# Altium PCB LPCB234R0.PcbDoc (part 1 of 2)
Units mm, origin at the board's own origin, x right, y up, seen from the top; angles counter-clockwise.
Board outline 194 x 165.7 mm, 2 copper layers (Top Layer, Bottom Layer); 143 components, 115 nets, 627 pads, 212 vias.
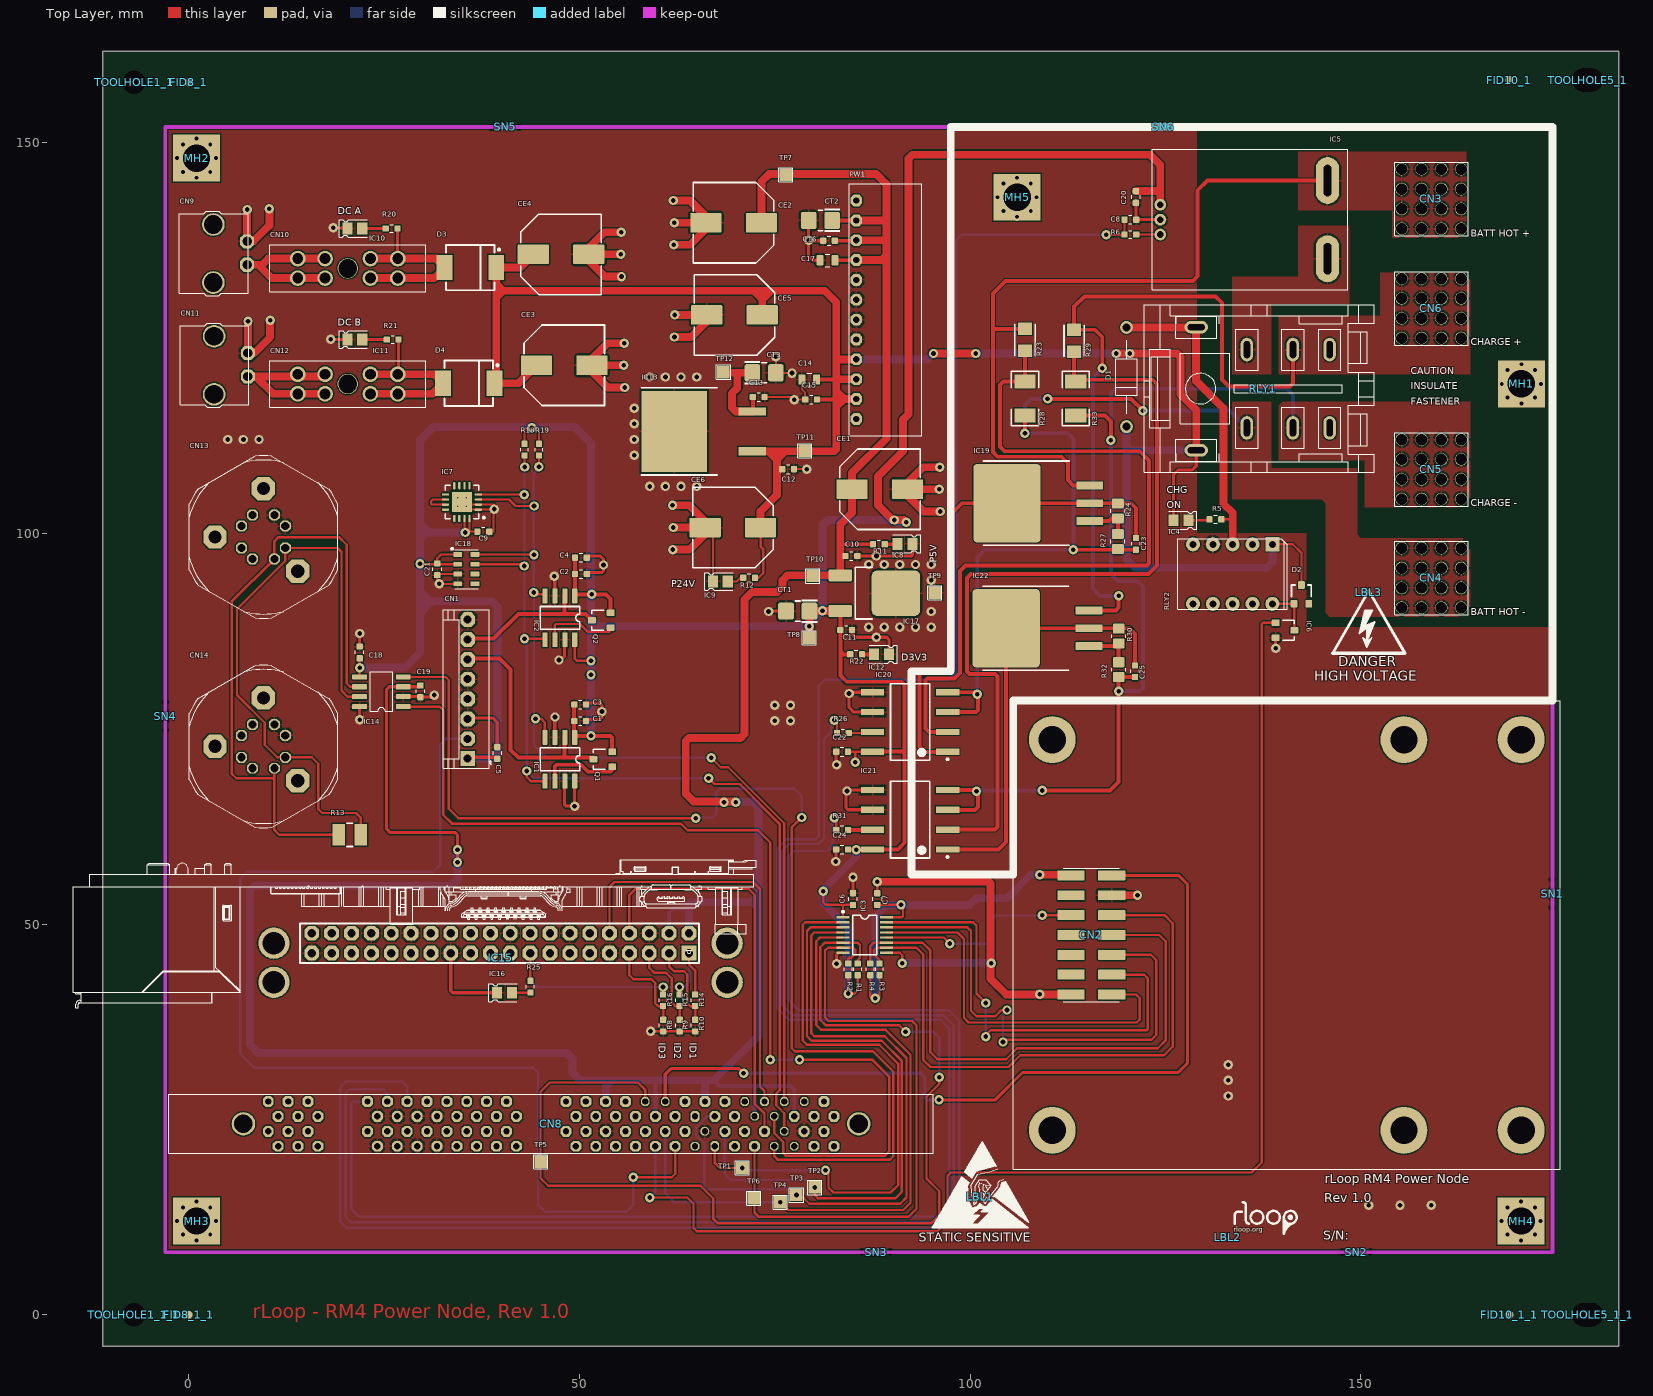
[diagram p0: Top Layer view]
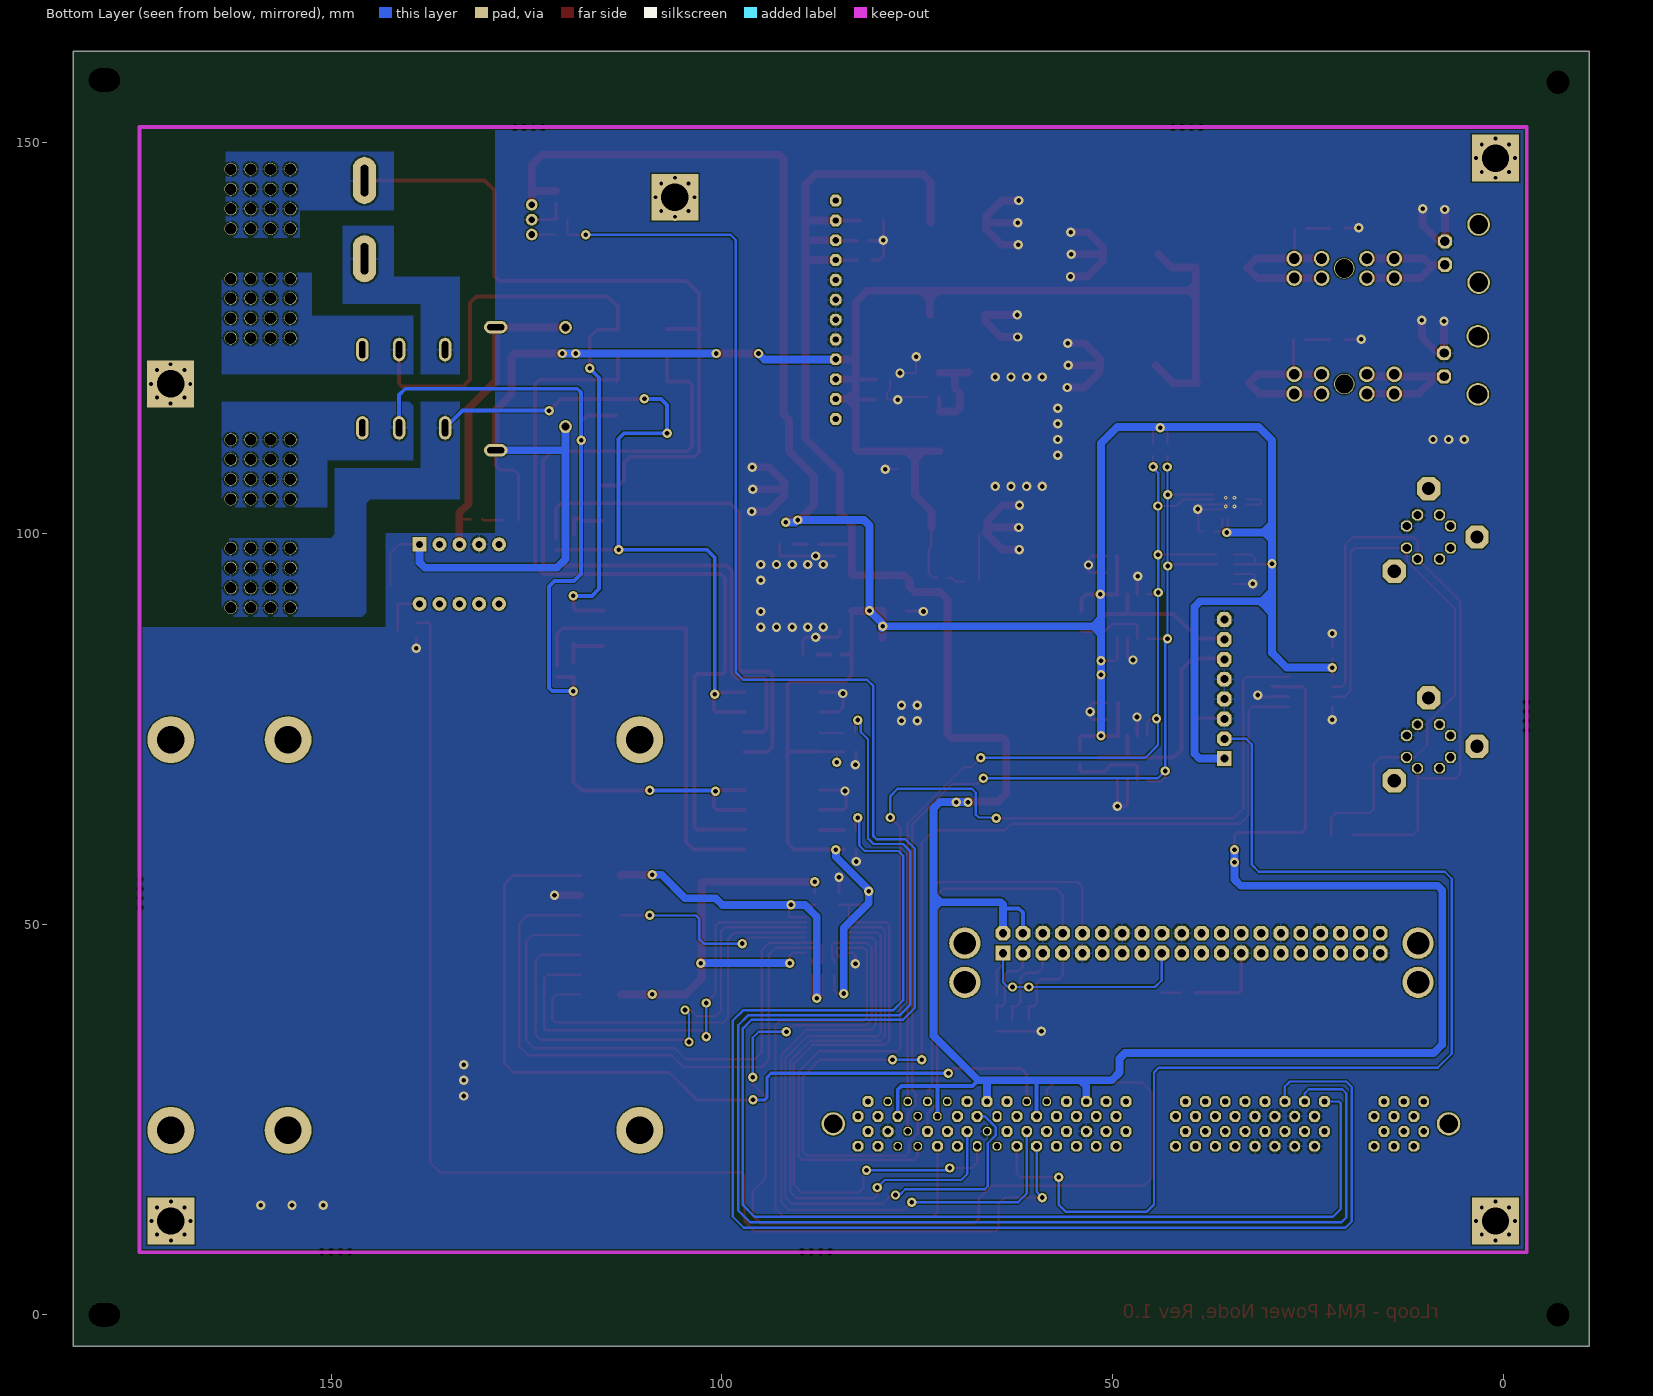
[diagram p1: Bottom Layer view, seen from below]

## Layer stack, top to bottom
Top Layer: signal copper 0.0356
Dielectric: core 0.32, FR-4, Dk 4.8
Bottom Layer: signal copper 0.0356

## Board outline
-11,-4 -11,161.695 183,161.695 183,-4

## Design rules (kind name [scope] priority, off if disabled: settings)
Clearance [All] p1: gap=0.16
HoleSize [All] p1: absolutevalues=TRUE maxlimit=5 minlimit=0.025 maxpercent=80.000 minpercent=20.000
MinimumSolderMaskSliver [All] p1 off: minsoldermaskwidth=0.1
PlaneClearance [All] p1: clearance=0.6
PolygonConnect [IsVia] p1: connectstyle=Direct reliefconductorwidth=0.254 reliefentries=4 polygonreliefangle="90 Angle" airgapwidth=0.254
PolygonConnect PolygonConnect_1 [All] p2: connectstyle=Relief reliefconductorwidth=0.254 reliefentries=4 polygonreliefangle="90 Angle" airgapwidth=0.254
RoomDefinition "U_LPCB234 - PI" [InComponentClass('U_LPCB234 - PI')] p1: confinementstyle=ConfineIn formatcopy=TRUE lockcomponents=FALSE outline -79.611,-126.179 -28.811,-126.179 -28.811,-100.779 -79.611,-100.779
RoomDefinition "U_LPCB234 - CAN" [InComponentClass('U_LPCB234 - CAN')] p2: confinementstyle=ConfineIn formatcopy=TRUE lockcomponents=FALSE outline 28.96,60.133 28.96,110.128 -0.24,110.128 -0.24,60.133
RoomDefinition "U_LPCB234 - PSU" [InComponentClass('U_LPCB234 - PSU')] p3: confinementstyle=ConfineIn formatcopy=TRUE lockcomponents=FALSE outline 54.93,146.887 54.93,81.698 96.88,81.698 96.88,146.887
RoomDefinition "U_LPCB234 - POWER INPUT" [InComponentClass('U_LPCB234 - POWER INPUT')] p4: confinementstyle=ConfineIn formatcopy=TRUE lockcomponents=FALSE outline -3.15,112.5 57.75,112.5 57.75,143.2 -3.15,143.2
RoomDefinition "U_LPCB234 - 24V POWER" [InComponentClass('U_LPCB234 - 24V POWER')] p5: confinementstyle=ConfineIn formatcopy=TRUE lockcomponents=FALSE outline -79.611,-126.179 -28.811,-126.179 -28.811,-100.779 -79.611,-100.779
RoomDefinition "U_LPCB234 - 1 WIRE DRIVER" [InComponentClass('U_LPCB234 - 1 WIRE DRIVER')] p6: confinementstyle=ConfineIn formatcopy=TRUE lockcomponents=FALSE outline 29.481,111.796 29.481,59.276 54.63,59.276 54.63,111.796
RoomDefinition "LPCB234 - OVERVIEW" [InComponentClass('LPCB234 - OVERVIEW')] p7: confinementstyle=ConfineIn formatcopy=TRUE lockcomponents=FALSE outline -79.611,-126.179 -28.811,-126.179 -28.811,-100.779 -79.611,-100.779
RoomDefinition "U_LPCB234 - CHARGER IF" [InComponentClass('U_LPCB234 - CHARGER IF')] p8: confinementstyle=ConfineIn formatcopy=TRUE lockcomponents=FALSE outline -79.611,-126.179 -28.811,-126.179 -28.811,-100.779 -79.611,-100.779
RoomDefinition "U_LPCB234 - CORE INTERFACE" [InComponentClass('U_LPCB234 - CORE INTERFACE')] p9: confinementstyle=ConfineIn formatcopy=TRUE lockcomponents=FALSE outline -79.611,-126.179 -28.811,-126.179 -28.811,-100.779 -79.611,-100.779
RoomDefinition "U_LPCB234 - BMS INTERFACE" [InComponentClass('U_LPCB234 - BMS INTERFACE')] p10: confinementstyle=ConfineIn formatcopy=TRUE lockcomponents=FALSE outline -79.611,-126.179 -28.811,-126.179 -28.811,-100.779 -79.611,-100.779
RoutingVias [All] p1: holewidth=0.6 width=1.2 viastyle="Through Hole" minholewidth=0.6 minwidth=1.2 maxholewidth=1 maxwidth=3
SilkToSilkClearance [All] p1 off: silktosilkclearance=0.254
SilkToSolderMaskClearance [IsPad] p1 off: minsilkscreentomaskgap=0.254 clearancetoexposedcopper=TRUE
SolderMaskExpansion [All] p1: expansion=0.102
Width [All] p1: maxlimit=2 minlimit=0.254 preferedwidth=0.254
23 further rules are at their usual default settings.

## Classes and differential pairs
component class "U_LPCB234 - PSU": C10 C11 C12 C13 C14 C15 C16 C17 CE1 CE2 CE5 CE6 CT1 CT2 CT3 IC8 IC9 IC12 IC13 IC17 PW1 R11 R12 R22 TP7 TP8 TP9 TP10 TP11 TP12
component class "U_LPCB234 - POWER INPUT": CE3 CE4 CN9 CN10 CN11 CN12 D3 D4 IC10 IC11 R20 R21
component class "U_LPCB234 - CORE INTERFACE": CN8
component class "U_LPCB234 - CHARGER IF": C8 C20 C22 C23 C24 C25 CN3 CN4 CN5 CN6 D1 D2 IC4 IC5 IC6 IC19 IC20 IC21 IC22 R5 R6 R23 R24 R26 R27 R28 R29 R30 R31 R32 R33 RLY1 RLY2
component class "U_LPCB234 - BMS INTERFACE": C6 C7 CN2 IC3 R1 R2 R3 R4 TP1 TP2 TP3 TP4 TP5 TP6
component class "U_LPCB234 - 24V POWER": CN1
component class "U_LPCB234 - 1 WIRE DRIVER": C1 C2 C3 C4 C5 C9 C21 IC1 IC2 IC7 IC18 Q1 Q2 R18 R19
component class "LPCB234 - OVERVIEW": LBL1 LBL2 LBL3 MH1 MH2 MH3 MH4 MH5 SN1 SN2 SN3 SN4 SN5 SN6
component class "U_LPCB234 - CAN": C18 C19 CN13 CN14 IC14 R13
component class "U_LPCB234 - PI": IC15 IC16 R8 R9 R10 R14 R15 R16 R25

## Components (designator, comment, footprint, x,y, rotation, side; value= is the part's Value field where it differs from the comment)
C1 "100n / 50V / 10% / SMD 0603" LFP011__CC1608-0603-IPC7351_B 50.09,75.985 r0 top
C2 "100n / 50V / 10% / SMD 0603" LFP011__CC1608-0603-IPC7351_B 50.19,94.785 r0 top
C3 "1uF / 10V / 10% / SMD 0603" LFP011__CC1608-0603-IPC7351_B 50.09,78.085 r0 top
C4 "1uF / 10V / 10% / SMD 0603" LFP011__CC1608-0603-IPC7351_B 50.19,96.885 r0 top
C5 "1uF / 10V / 10% / SMD 0603" LFP011__CC1608-0603-IPC7351_B 39.49,71.885 r90 top
C6 "100n / 50V / 10% / SMD 0603" LFP011__CC1608-0603-IPC7351_B 85,53.2 r90 top
C7 "100n / 50V / 10% / SMD 0603" LFP011__CC1608-0603-IPC7351_B 88.1,53.2 r90 top
C8 "10pF / 50V / 5% / SMD 0603" LFP011__CC1608-0603-IPC7351_B 120.497,140.133 r0 top
C9 "100n / 50V / 10% / SMD 0603" LFP011__CC1608-0603-IPC7351_B 37.7,100.2 r0 top
C10 "100n / 50V / 10% / SMD 0603" LFP011__CC1608-0603-IPC7351_B 84.8,97.1 r0 top
C11 "100n / 50V / 10% / SMD 0603" LFP011__CC1608-0603-IPC7351_B 84.13,87.638 r0 top
C12 "100n / 50V / 10% / SMD 0603" LFP011__CC1608-0603-IPC7351_B 76.7,108.2 r0 top
C13 "100n / 50V / 10% / SMD 0603" LFP011__CC1608-0603-IPC7351_B 72.93,117.438 r0 top
C14 "1uF / 50V / 10% / SMD 0805" LFP010__CC2012-0805-IPC7351_B 79.4,119.68 r180 top
C15 "100n / 50V / 10% / SMD 0603" LFP011__CC1608-0603-IPC7351_B 79.64,117.12 r180 top
C16 "100n / 50V / 10% / SMD 0603" LFP011__CC1608-0603-IPC7351_B 81.93,137.438 r180 top
C17 "1uF / 50V / 10% / SMD 0805" LFP010__CC2012-0805-IPC7351_B 81.73,134.938 r180 top
C18 "100n / 50V / 10% / SMD 0603" LFP011__CC1608-0603-IPC7351_B 21.87,84.76 r90 top
C19 "100n / 50V / 10% / SMD 0603" LFP011__CC1608-0603-IPC7351_B 29.64,79.78 r270 top
C20 "100nF / 50V / 10% / SMD 0603" LFP011__CC1608-0603-IPC7351_B 121.197,143.033 r270 top
C21 "100n / 50V / 10% / SMD 0603" LFP011__CC1608-0603-IPC7351_B 31.8,95.4 r270 top
C22 "100nF / 50V / 10% / SMD 0603" LFP011__CC1608-0603-IPC7351_B 83.6,72.048 r180 top
C23 "100nF / 50V / 10% / SMD 0603" LFP011__CC1608-0603-IPC7351_B 121.2,98.648 r270 top
C24 "100nF / 50V / 10% / SMD 0603" LFP011__CC1608-0603-IPC7351_B 83.6,59.548 r180 top
C25 "100nF / 50V / 10% / SMD 0603" LFP011__CC1608-0603-IPC7351_B 121.1,82.348 r270 top
CE1 "330uF / 35V / 20% / SMD 10x10" LFP041__NICHICON_WT_10X10 88.43,105.638 r0 top
CE2 "330uF / 35V / 20% / SMD 10x10" LFP041__NICHICON_WT_10X10 69.73,139.738 r180 top
CE3 "330uF / 35V / 20% / SMD 10x10" LFP041__NICHICON_WT_10X10 48.05,121.5 r0 top
CE4 "330uF / 35V / 20% / SMD 10x10" LFP041__NICHICON_WT_10X10 47.65,135.7 r0 top
CE5 "330uF / 35V / 20% / SMD 10x10" LFP041__NICHICON_WT_10X10 69.83,127.938 r180 top
CE6 "330uF / 35V / 20% / SMD 10x10" LFP041__NICHICON_WT_10X10 69.63,100.738 r180 top
CN1 "640456-8" 640456-8 35.7,80.058 r90 top
CN2 "1241050-7" 1241050-7 115.5,48.6 r90 top locked
CN3 "7461383" 7461383 159.02,142.78 r180 top locked
CN4 "7461383" 7461383 159.02,94.285 r0 top locked
CN5 "7461383" 7461383 159.02,108.185 r0 top
CN6 "7461383" 7461383 159.02,128.785 r0 top locked
CN8 "5390213-1" 5390213-1 7,24.428 r0 top locked
CN9 "1445054-2" 1445054-2 3.15,135.8 r270 top
CN10 "SI-H-FKS 30" SI-H-FKS-30 20.35,133.9 r180 top
CN11 "1445054-2" 1445054-2 3.25,121.5 r270 top
CN12 "SI-H-FKS 30" SI-H-FKS-30 20.35,119.1 r180 top
CN13 "2232331-1" 2232331-1 9.56,99.528 r90 top
CN14 "2232331-1" 2232331-1 9.56,72.733 r90 top
CT1 "22uF / 16V / 10% / SMD TC3528" LFP018__TC3528 77.93,90.038 r180 top
CT2 "22uF / 16V / 10% / SMD TC3528" LFP018__TC3528 80.83,140.038 r180 top
CT3 "22uF / 16V / 10% / SMD TC3528" LFP018__TC3528 73.63,120.538 r0 top
D1 "1N4004" DO-41 120,126.348 r270 top
D2 "BAS16" LFP021__SOT23 142.385,92.185 r0 top
D3 "S3M-E3/57T" LFP040__DO-214AB 36.05,134 r180 top
D4 "S3M-E3/57T" LFP040__DO-214AB 35.85,119.2 r180 top
FID8_1 "FIDUCIAL" FIDTOP 0,157.695 r0 top
FID8_1_1 "FIDUCIAL" FIDTOP 0,0 r0 top
FID10_1 "FIDUCIAL" FIDTOP 169,158 r0 top
FID10_1_1 "FIDUCIAL" FIDTOP 169,0 r0 top
IC1 "DS2482S-100+T&R" LFP069__R-8G 47.49,71.085 r180 top
IC2 "DS2482S-100+T&R" LFP069__R-8G 47.49,89.185 r180 top
IC3 "MAX14850AEE+" LFP137__PW016 86.5,48.6 r270 top
IC4 "EL-17-21VGC/TR8" CR2012-0805-LED 126.985,101.685 r180 top
IC5 "ACS759LCB-050B-PFF-T" CB-PFF 124.32,140.138 r270 top
IC6 "NUD3124LT1G" LFP021__SOT23 140.285,87.585 r270 top
IC7 "TSYS01" LFP135__QFN65P400X400X80_HS-17M 34.96,103.998 r90 top
IC8 "EL-17-21VGC/TR8" CR2012-0805-LED 91.65,98.64 r180 top
IC9 "EL-17-21VGC/TR8" CR2012-0805-LED 68.03,93.838 r0 top
IC10 "EL-17-21VGC/TR8" CR2012-0805-LED 21.25,139 r0 top
IC11 "EL-17-21VGC/TR8" CR2012-0805-LED 21.25,124.8 r0 top
IC12 "EL-17-21VGC/TR8" CR2012-0805-LED 88.66,84.51 r180 top
IC13 "NCV8674DS120G" LFP082__D2PAK 67.63,113.038 r90 top
IC14 "MCP2562T-E/SN" LFP017__SO-G8/Y1.9 24.66,79.728 r90 top
IC15 "RASPBERRY_PI_B" RASPBERRY_PI_B_VERT 68.9,47.548 r180 top locked
IC16 "EL-17-21VGC/TR8" CR2012-0805-LED 40.4,41.2 r0 top
IC17 "NCV4274DT33RKG" LFP019__369A-13 87.93,92.338 r270 top
IC18 "MS5607-02BA03" LFP140__QFN8 35.53,95.418 r0 top
IC19 "TL783CKTTR" LFP147__KTT-R-PSFM-G3 104.7,103.848 r90 top
IC20 "AMC1100DWV" LFP116__R-PDSO-G8 92.3,75.848 r90 top
IC21 "AMC1100DWV" LFP116__R-PDSO-G8 92.3,63.348 r90 top
IC22 "TL783CKTTR" LFP147__KTT-R-PSFM-G3 104.6,87.848 r90 top
LBL1 "STATIC LABEL" STATIC_LABEL 101.28,15.088 r0 top
LBL2 "RLOOP_LOGO" RLOOP_LOGO 132.96,9.948 r0 top
LBL3 "HIGH VOLT LABEL" "HIGH VOLT LABEL" 151,92.448 r0 top
MH1 "MOUNTING_HOLE_3MM_SQ" MOUNTING_HOLE_3MM_SQ 170.52,119.128 r0 top
MH2 "MOUNTING_HOLE_3MM_SQ" MOUNTING_HOLE_3MM_SQ 1,148 r0 top locked
MH3 "MOUNTING_HOLE_3MM_SQ" MOUNTING_HOLE_3MM_SQ 1,12 r0 top locked
MH4 "MOUNTING_HOLE_3MM_SQ" MOUNTING_HOLE_3MM_SQ 170.5,12 r0 top locked
MH5 "MOUNTING_HOLE_3MM_SQ" MOUNTING_HOLE_3MM_SQ 106,143 r0 top locked
PW1 "R-625.0P" R-625.0P 85.43,114.638 r90 top
Q1 "BSS84" LFP021__SOT23 52.99,71.085 r90 top
Q2 "BSS84" LFP021__SOT23 52.79,88.885 r90 top
R1 "10K / 0.1W / 1% / SMD 0603" LFP020__CR1608-0603-IPC7351_B 85.6,44.2 r270 top
R2 "10K / 0.1W / 1% / SMD 0603" LFP020__CR1608-0603-IPC7351_B 84.4,44.2 r270 top
R3 "10K / 0.1W / 1% / SMD 0603" LFP020__CR1608-0603-IPC7351_B 88.4,44.2 r270 top
R4 "10K / 0.1W / 1% / SMD 0603" LFP020__CR1608-0603-IPC7351_B 87.2,44.2 r270 top
R5 "4.7K / 0.1W / 1% / SMD 0603" LFP020__CR1608-0603-IPC7351_B 131.385,101.785 r180 top
R6 "47R / 0.1W / 1% / SMD 0603" LFP020__CR1608-0603-IPC7351_B 120.497,138.233 r0 top
R8 "0R / 0.1W / SMD 0603" LFP020__CR1608-0603-IPC7351_B 60.72,37.01 r270 top
R9 "0R / 0.1W / SMD 0603" LFP020__CR1608-0603-IPC7351_B 62.82,37.01 r270 top
R10 "0R / 0.1W / SMD 0603" LFP020__CR1608-0603-IPC7351_B 64.82,37.01 r270 top
R11 "2.2K / 0.1W / 1% / SMD 0603" LFP020__CR1608-0603-IPC7351_B 88.32,98.6 r180 top
R12 "2.2K / 0.1W / 1% / SMD 0603" LFP020__CR1608-0603-IPC7351_B 71.7,94.3 r0 top
R13 "121R / 0.33W / 1% / SMD 1210" LFP028__CR3225-1210 20.6,61.42 r180 top
R14 "10K / 0.1W / 1% / SMD 0603" LFP020__CR1608-0603-IPC7351_B 64.8,40.248 r270 top
R15 "10K / 0.1W / 1% / SMD 0603" LFP020__CR1608-0603-IPC7351_B 62.8,40.248 r270 top
R16 "10K / 0.1W / 1% / SMD 0603" LFP020__CR1608-0603-IPC7351_B 60.7,40.248 r270 top
R18 "4.7K / 0.1W / 1% / SMD 0603" LFP020__CR1608-0603-IPC7351_B 42.96,110.698 r90 top
R19 "4.7K / 0.1W / 1% / SMD 0603" LFP020__CR1608-0603-IPC7351_B 44.82,110.698 r90 top
R20 "2.2K / 0.1W / 1% / SMD 0603" LFP020__CR1608-0603-IPC7351_B 25.95,139 r0 top
R21 "2.2K / 0.1W / 1% / SMD 0603" LFP020__CR1608-0603-IPC7351_B 26.09,124.792 r0 top
R22 "2.2K / 0.1W / 1% / SMD 0603" LFP020__CR1608-0603-IPC7351_B 85.39,84.51 r180 top
R23 "300K / 0.5W / 1% / SMD 1206" LFP107__CR3216-1206 107,124.748 r90 top
R24 "82R0 / 0.25W / 1% / SMD 0805" LFP029__CR2012-0805 118.9,102.848 r90 top
R25 "2.2K / 0.1W / 1% / SMD 0603" LFP020__CR1608-0603-IPC7351_B 43.72,41.978 r90 top
R26 "1K0 / 0.063W / 1% / SMD 0603" LFP020__CR1608-0603-IPC7351_B 83.7,74.448 r180 top
R27 "220R / 0.25W / 1% / SMD 0805" LFP029__CR2012-0805 118.9,98.948 r90 top
R28 "1K / 0.75W / 5% / 400V / SMD 2010" LFP060__CR5025-2010 107,117.248 r90 top
R29 "300K / 0.5W / 1% / SMD 1206" LFP107__CR3216-1206 113.3,124.648 r90 top
R30 "82R0 / 0.25W / 1% / SMD 0805" LFP029__CR2012-0805 119,86.848 r90 top
R31 "1K0 / 0.063W / 1% / SMD 0603" LFP020__CR1608-0603-IPC7351_B 83.6,62.048 r180 top
R32 "220R / 0.25W / 1% / SMD 0805" LFP029__CR2012-0805 119,82.548 r90 top
R33 "1K / 0.75W / 5% / 400V / SMD 2010" LFP060__CR5025-2010 113.5,117.248 r90 top
RLY1 "K10P-11D15-24" K10P-11D15-24 137.46,118.498 r270 top locked
RLY2 "TQ2-24" TQ2 133.585,94.785 r180 top
SN1 "PCB_SNAPOUT" SNAPOUT_NEW 174.5,52.1 r90 top
SN2 "PCB_SNAPOUT" SNAPOUT_NEW 151.2,8 r180 top
SN3 "PCB_SNAPOUT" SNAPOUT_NEW 89.75,8 r180 top
SN4 "PCB_SNAPOUT" SNAPOUT_NEW -3,74.8 r90 top
SN5 "PCB_SNAPOUT" SNAPOUT_NEW 42.3,152 r180 top
SN6 "PCB_SNAPOUT" SNAPOUT_NEW 126.5,152 r180 top
TOOLHOLE1_1 "Comment" TOOL-1#1 -7,157.695 r0 top
TOOLHOLE1_1_1 "Comment" TOOL-1#1 -7,0 r0 top
TOOLHOLE5_1 "Comment" TOOL-1#2 179,158 r0 top
TOOLHOLE5_1_1 "Comment" TOOL-1#2 179,0 r0 top
TP1 "SMD_TP" SMD-TP 70.82,18.79 r0 top
TP2 "SMD_TP" SMD-TP 80.12,16.29 r0 top
TP3 "SMD_TP" SMD-TP 77.77,15.33 r0 top
TP4 "SMD_TP" SMD-TP 75.71,14.42 r0 top
TP5 "SMD_TP" SMD-TP 45.02,19.6 r0 top
TP6 "SMD_TP" SMD-TP 72.29,14.93 r0 top
TP7 "SMD_TP" SMD-TP 76.39,145.87 r0 top
TP8 "SMD_TP" SMD-TP 79.43,86.638 r0 top
TP9 "SMD_TP" SMD-TP 95.47,92.4 r0 top
TP10 "SMD_TP" SMD-TP 79.83,94.538 r0 top
TP11 "SMD_TP" SMD-TP 78.85,110.54 r0 top
TP12 "SMD_TP" SMD-TP 68.43,120.638 r0 top

## Footprints (in the part's own frame and the unit in brackets; to place one, negate y for a bottom-side part, rotate by r counter-clockwise, add the part's x,y. Pads: shape width x height; smd on the part's side, far side on the other; paste and mask are expansions set on the pad)
640456-8 [mm] "Connector, Male Header, 8 Way"
  rect 1.905x1.905 hole 1.02: 1(-8.89,0)
  oct 1.905x1.905 hole 1.02: 2(-6.35,0) 3(-3.81,0) 4(-1.27,0) 5(1.27,0) 6(3.81,0) 7(6.35,0) 8(8.89,0)
  silkscreen extent -10.15,-3.04 10.17,3.1
1241050-7 [mm]
  rrect10% 1.27x3.5 smd paste-0.01: 1(-7.62,-2.605) 2(-7.62,2.605) 3(-5.08,-2.605) 4(-5.08,2.605) 5(-2.54,-2.605) 6(-2.54,2.605) 7(0,-2.605) 8(0,2.605) 9(2.54,-2.605) 10(2.54,2.605) 11(5.08,-2.605) 12(5.08,2.605) 13(7.62,-2.605) 14(7.62,2.605)
  silkscreen extent -8.54,-3.6 8.54,3.6
1445054-2 [mm]
  oct 1.8x1.8 hole 1.2: 1(1.435,4.32) 2(-1.565,4.32)
  round 2.9 hole 2.4: B(-3.715,0) B(3.715,0)
  silkscreen extent -5.4,-4.36 5.4,4.46
2232331-1 [mm]
  oct 1.4x1.4 hole 1.05: 1(-1.4,-2.8) 2(-2.8,-1.4) 3(-2.8,1.4) 4(-1.4,2.8) 5(1.4,2.8) 6(2.8,1.4) 7(2.8,-1.4) 8(1.4,-2.8)
  oct 3x3 hole 1.7: B(-4.38,-4.38) B(0,6.2) B(6.2,0)
  silkscreen extent -10.41,-9.51 10.39,9.49
5390213-1 [mm] "Connector, DIMM 100"
  oct 1.4x1.4 hole 0.81: 1(3.175,-0.96) 2(4.445,-2.86) 3(5.715,-0.96) 4(6.985,-2.86) 5(8.255,-0.96) 6(9.525,-2.86) 7(15.875,-0.96) 8(17.145,-2.86) 9(18.415,-0.96) 10(19.685,-2.86) 11(20.955,-0.96) 12(22.225,-2.86) 13(23.495,-0.96) 14(24.765,-2.86) 15(26.035,-0.96) 16(27.305,-2.86) 17(28.575,-0.96) 18(29.845,-2.86) 19(31.115,-0.96) 20(32.385,-2.86) 21(33.655,-0.96) 22(34.925,-2.86) 23(41.275,-0.96) 24(42.545,-2.86) 25(43.815,-0.96) 26(45.085,-2.86) 27(46.355,-0.96) 28(47.625,-2.86) 29(48.895,-0.96) 30(50.165,-2.86) 31(51.435,-0.96) 32(52.705,-2.86) 33(53.975,-0.96) 34(55.245,-2.86) 35(56.515,-0.96) 39(61.595,-0.96) 40(62.865,-2.86) 41(64.135,-0.96) 42(65.405,-2.86) 43(66.675,-0.96) 47(71.755,-0.96) 48(73.025,-2.86) 49(74.295,-0.96) 50(75.565,-2.86) 51(3.175,2.86) 52(4.445,0.96) 53(5.715,2.86) 54(6.985,0.96) 55(8.255,2.86) 56(9.525,0.96) 57(15.875,2.86) 58(17.145,0.96) 59(18.415,2.86) 60(19.685,0.96) 61(20.955,2.86) 62(22.225,0.96) 63(23.495,2.86) 64(24.765,0.96) 65(26.035,2.86) 66(27.305,0.96) 67(28.575,2.86) 68(29.845,0.96) 69(31.115,2.86) 70(32.385,0.96) 71(33.655,2.86) 72(34.925,0.96) 73(41.275,2.86) 74(42.545,0.96) 75(43.815,2.86) 76(45.085,0.96) 77(46.355,2.86) 78(47.625,0.96) 79(48.895,2.86) 80(50.165,0.96) 82(52.705,0.96) 84(55.245,0.96) 85(56.515,2.86) 87(59.055,2.86) 88(60.325,0.96) 89(61.595,2.86) 90(62.865,0.96) 96(70.485,0.96) 98(73.025,0.96) 99(74.295,2.86) 100(75.565,0.96)
  oct 1.1x1.1 hole 0.81: 36(57.785,-2.86) 37(59.055,-0.96) 44(67.945,-2.86) 45(69.215,-0.96) 46(70.485,-2.86) 81(51.435,2.86) 83(53.975,2.86) 91(64.135,2.86) 92(65.405,0.96) 93(66.675,2.86) 94(67.945,0.96) 95(69.215,2.86) 97(71.755,2.86)
  oct 1.1x1.4 hole 0.81: 38(60.325,-2.86) 86(57.785,0.96)
  round 3 hole 2.36: B(0,0) B(78.74,0)
  silkscreen extent -9.53,-3.77 88.27,3.77
7461383 [mm]
  round 1.6 hole 1.48: 1(-3.81,3.81) 1(-3.81,-1.27) 1(-3.81,1.27) 1(-3.81,-3.81) 1(-1.27,3.81) 1(-1.27,1.27) 1(-1.27,-1.27) 1(-1.27,-3.81) 1(1.27,3.81) 1(1.27,1.27) 1(1.27,-1.27) 1(1.27,-3.81) 1(3.81,3.81) 1(3.81,-1.27) 1(3.81,1.27) 1(3.81,-3.81)
  silkscreen extent -4.7,-4.7 4.7,4.7
CB-PFF [mm]
  round 1.5 hole 0.85: 1(-1.91,0) 2(0,0) 3(1.91,0)
  oval 6x3 hole 1 slot 4 at 0 deg: A(-5,21.4) B(5,21.4)
  silkscreen extent -9,-1 9,24
CR2012-0805-LED [mm]
  rect 1.3x1.5 smd: A(0.95,0) K(-0.95,0)
  silkscreen extent -2.01,-1.14 1.63,1.14
DO-41 [mil]
  round 65 hole 40: A(0,0) K(500,0)
  silkscreen extent 65,-53 435,53
FIDTOP [mil]
  round 40 smd mask+39.37: 1(0,0)
"HIGH VOLT LABEL" [mm]
  silkscreen extent -4.62,-7.79 4.62,0.21
K10P-11D15-24 [mm]
  oval 3x1.6 hole 0.8 slot 2.2 at 0 deg: 1(5.005,8.535) 2(-5.005,8.535) 3(5.005,3.835) 4(-5.005,3.835) 5(5.005,-2.055) 6(-5.005,-2.055)
  oval 1.6x3 hole 0.8 slot 2.2 at 90 deg: A(7.875,-8.535) B(-7.875,-8.535)
  silkscreen extent -10.73,-15.17 10.71,14.24
LFP010__CC2012-0805-IPC7351_B [mm]
  rrect25% 0.9x1.3 smd paste-0.01: 1(-0.95,0) 2(0.95,0)
  silkscreen extent -0.3,-0.8 0.3,0.8
LFP011__CC1608-0603-IPC7351_B [mm]
  rrect25% 0.8x0.8 smd: 1(-0.75,0) 2(0.75,0)
  silkscreen extent -0.2,-0.55 0.2,0.55
LFP017__SO-G8/Y1.9 [mm]
  rrect25% 0.65x1.9 smd: 1(-1.905,-2.8) 2(-0.635,-2.8) 3(0.635,-2.8) 4(1.905,-2.8) 5(1.905,2.8) 6(0.635,2.8) 7(-0.635,2.8) 8(-1.905,2.8)
  silkscreen extent -2.52,-1.45 2.52,1.45
LFP018__TC3528 [mm]
  rrect25% 2x2.2 smd: 1(-1.5,0) 2(1.5,0)
  silkscreen extent -2.51,-1.5 0.3,1.5
LFP019__369A-13 [mil]
  rrect25% 60x120 smd: 1(-90,-179.49) 3(90,-179.49)
  rrect25% 230x245 smd paste-196.85: 4(0,100.75)
  silkscreen extent -130,-104 130,-19
LFP020__CR1608-0603-IPC7351_B [mm]
  rrect25% 0.8x0.8 smd: 1(-0.75,0) 2(0.75,0)
  silkscreen extent -0.2,-0.5 0.2,0.5
LFP021__SOT23 [mm] "SOT-23; 3 Leads; Body 3.0 x 2.5 mm, inc. leads (LxW max)"
  rrect25% 0.85x1 smd paste-0.05: 1(-0.95,-1.2) 2(0.95,-1.2) 3(0,1.2)
  silkscreen extent -1.27,-0.3 1.28,1.2
LFP028__CR3225-1210 [mm]
  rect 1.6x2.7 smd: 1(-1.4,0) 2(1.4,0)
  silkscreen extent -0.4,-1.5 0.4,1.5
LFP029__CR2012-0805 [mm]
  rrect25% 1.3x1.5 smd paste-0.01: 1(-0.95,0) 2(0.95,0)
  silkscreen extent -0.2,-0.9 0.2,0.9
LFP040__DO-214AB [mm]
  rect 2.032x3.2 smd: 1(-3.3,0) 2(3.3,0)
  silkscreen extent -3.8,-2.9 3.1,2.9
LFP041__NICHICON_WT_10X10 [mm]
  rrect10% 4x2.5 smd paste-0.02: 1(-3.55,0) 2(3.55,0)
  silkscreen extent -5.15,-5.15 5.15,5.15
LFP060__CR5025-2010 [mm]
  rect 1.8x2.7 smd: 1(-2.2,0) 2(2.2,0)
  silkscreen extent -3.5,-1.75 3.5,1.75
LFP069__R-8G [mm] "Small Outline; 8 Leads; Body Width 3.9 mm; Pitch 1.27 mm"
  rrect25% 0.65x1.9 smd paste-0.05: 1(-1.905,-2.8) 2(-0.635,-2.8) 3(0.635,-2.8) 4(1.905,-2.8) 5(1.905,2.8) 6(0.635,2.8) 7(-0.635,2.8) 8(-1.905,2.8)
  silkscreen extent -2.52,-1.45 2.52,1.45
LFP082__D2PAK [mm] "D2-PAK/TO-263-AB; 3 Leads (1 Cropped); Body 15.5 (inc. leads) x 10.5 mm (LxW max)"
  rect 1.05x3.5 smd: 1(-2.54,-4.5) 3(2.54,-4.5)
  rect 10.4x8.38 smd paste-1: 2(0,5.5)
  silkscreen extent -5.58,0 5.58,9.7
LFP107__CR3216-1206 [mm]
  rect 1.6x1.8 smd: 1(-1.4,0) 2(1.4,0)
  silkscreen extent -2,-1.3 2,1.3
LFP116__R-PDSO-G8 [mm] "SOP, 8-Leads, Body 9.50x6.62mm, Pitch 2.54mm, IPC Medium Density"
  rect 0.8x3 smd: 1(-3.81,-4.8) 2(-1.27,-4.8) 3(1.27,-4.8) 4(3.81,-4.8) 5(3.81,4.8) 6(1.27,4.8) 7(-1.27,4.8) 8(-3.81,4.8)
  silkscreen extent -4.9,-4.93 4.9,2.5
LFP135__QFN65P400X400X80_HS-17M [mm] "QFN, 16-Leads, Body 4.00x4.00mm, Pitch 0.65mm, Thermal Pad 2.60x2.60mm, IPC Low Density"
  oval 0.3x0.95 smd paste-0.05: 1(-0.975,-2.1) 2(-0.325,-2.1) 3(0.325,-2.1) 4(0.975,-2.1) 9(0.975,2.1) 10(0.325,2.1) 11(-0.325,2.1) 12(-0.975,2.1)
  oval 0.95x0.3 smd paste-0.05: 5(2.1,-0.975) 6(2.1,-0.325) 7(2.1,0.325) 8(2.1,0.975) 13(-2.1,0.975) 14(-2.1,0.325) 15(-2.1,-0.325) 16(-2.1,-0.975)
  rect 2.6x2.6 smd paste-5: PAD(0,0)
  silkscreen extent -2.15,-2.93 2.15,2.15
LFP137__PW016 [mm] "Shrink Small Outline; 16 Leads; Body Width 4.4 mm; Pitch 0.65 mm"
  rrect10% 0.3x1.65 smd paste-0.03: 1(-2.275,-2.775) 2(-1.625,-2.775) 3(-0.975,-2.775) 4(-0.325,-2.775) 5(0.325,-2.775) 6(0.975,-2.775) 7(1.625,-2.775) 8(2.275,-2.775) 9(2.275,2.775) 10(1.625,2.775) 11(0.975,2.775) 12(0.325,2.775) 13(-0.325,2.775) 14(-0.975,2.775) 15(-1.625,2.775) 16(-2.275,2.775)
  silkscreen extent -3.1,-2.9 2.55,1.55
LFP140__QFN8 [mm]
  rrect10% 1.1x0.6 smd: 1(-1.1,1.875) 2(-1.1,0.625) 3(-1.1,-0.625) 4(-1.1,-1.875) 5(1.1,-1.875) 6(1.1,-0.625) 7(1.1,0.625) 8(1.1,1.875)
  silkscreen extent -1.95,-2.5 1.5,2.72
LFP147__KTT-R-PSFM-G3 [mm]
  rrect10% 1x3.4 smd: 1(-2.285,-10.6) 2(0,-10.6) 3(2.285,-10.6)
  rrect10% 10x8.6 smd: 4(0,0)
  silkscreen extent -5.4,-8 5.4,3
MOUNTING_HOLE_3MM_SQ [mm] "Non-plated mounting hole for 3mm screw"
  rect 6x6 hole 3.5 mask+0.051: MOUNT(0,0)
R-625.0P [mm]
  oct 1.5x1.5 hole 0.8: 1(0,0) 2(2.54,0) 3(5.08,0) 4(7.62,0) 5(10.16,0) 6(12.7,0) 7(15.24,0) 8(17.78,0) 9(20.32,0) 10(22.86,0) 11(25.4,0) 12(27.94,0)
  silkscreen extent -2.13,-8.4 30.07,0.9
RASPBERRY_PI_B_VERT [mm]
  rect 1.905x1.905 hole 1.067: 1(4.89,1.27)
  oct 1.905x1.905 hole 1.067: 2(4.89,-1.27) 3(7.43,1.27) 4(7.43,-1.27) 5(9.97,1.27) 6(9.97,-1.27) 7(12.51,1.27) 8(12.51,-1.27) 9(15.05,1.27) 10(15.05,-1.27) 11(17.59,1.27) 12(17.59,-1.27) 13(20.13,1.27) 14(20.13,-1.27) 15(22.67,1.27) 16(22.67,-1.27) 17(25.21,1.27) 18(25.21,-1.27) 19(27.75,1.27) 20(27.75,-1.27) 21(30.29,1.27) 22(30.29,-1.27) 23(32.83,1.27) 24(32.83,-1.27) 25(35.37,1.27) 26(35.37,-1.27) 27(37.91,1.27) 28(37.91,-1.27) 29(40.45,1.27) 30(40.45,-1.27) 31(42.99,1.27) 32(42.99,-1.27) 33(45.53,1.27) 34(45.53,-1.27) 35(48.07,1.27) 36(48.07,-1.27) 37(50.61,1.27) 38(50.61,-1.27) 39(53.15,1.27) 40(53.15,-1.27)
  round 4 hole 2.9: B(0,5) B(0,0) B(58,0) B(58,5)
  silkscreen extent -3.72,-10.68 83.69,8.25
RLOOP_LOGO [mm]
  silkscreen extent 0.89,0.39 8.82,4.45
SI-H-FKS-30 [mm] "Connector, Blade Fuse Holder, 5mm Terminals, 30A Max, PTH"
  round 2 hole 1.4: 1(2.9,-1.25) 1(2.9,1.25) 1(6.4,-1.25) 1(6.4,1.25) 2(-6.4,-1.25) 2(-6.4,1.25) 2(-2.9,-1.25) 2(-2.9,1.25)
  round 2.6 hole 2.4: B(0,0)
  silkscreen extent -10,-3 10,3
SMD-TP [mm]
  rect 1.6x1.6 smd paste-2: 1(0,0)
  silkscreen extent -0.9,-0.9 0.9,0.9
SNAPOUT_NEW [mm]
  round 0.4 hole 0.8 unplated: 0(0,0) 0(1.2,0) 0(2.4,0) 0(3.6,0)
STATIC_LABEL [mm]
  silkscreen extent -6.16,-3.95 6.18,7.02
TOOL-1#1 [mm]
  round 2.54 hole 3 unplated: TOOL(0,0)
TOOL-1#2 [mm]
  round 0.076 hole 3 slot 4 at 0 deg unplated: TOOL1(0,0)
TQ2 [mm]
  rect 1.8x1.8 hole 0.9: 1(-5.08,-3.81)
  round 1.8 hole 0.9: 2(-2.54,-3.81) 3(0,-3.81) 4(2.54,-3.81) 5(5.08,-3.81) 6(5.08,3.81) 7(2.54,3.81) 8(0,3.81) 9(-2.54,3.81) 10(-5.08,3.81)
  silkscreen extent -7,-4.5 7,4.5

## Part data
C1 C2 C6 C7 C9 C10 C11 C12 C13 C15 C16 C18 C19 C20 C21 C22 C23 C24 C25: "Capacitor, Ceramic Chip, 100nF (0.1uF), 50V, 5%, SMD 0603 [LCA016]"
C3 C4 C5: "Capacitor, Ceramic Chip, 1uF, 10V, SMD 0603 [LCA070]"
C8: "Capacitor, Ceramic Chip, 10pF, 50V, 5%, SMD 0603 [LCA019]"
C14 C17: "Capacitor, Ceramic Chip, 1uF, 50V, SMD 0805 [LCA098]"
CE1 CE2 CE3 CE4 CE5 CE6: "Capacitor, Aluminum Electrolytic, 330uF, 35V, 20%, SMD (10mm x 10mm) [LCA071]"
CN1: "Connector, Male Header, 8 Way"
CN2: "Connector, Header, 2.54mm, 7 Pins x 2 Rows, SMD"
CN3 CN4 CN5 CN6: "Terminal, Bush with M5 Shank"
CN8: "Connector, DIMM 100"
CN9 CN11: "Connector, MATE-N-LOK, Header, 2 Way, PTH"
CN10 CN12: "Connector, Blade Fuse Holder, 5mm Terminals, 30A Max, PTH"
CN13 CN14: "Connector, M12 8 Way, PCB Mount"
CT1 CT2 CT3: "Capacitor, Tantalum, 22uF, 16V, 10%, SMD TC3528 (BCASE) [LCA039]"
D1: "Diode, General Purpose Rectifier, 1A, PTH [LIC010]"
D2: "Diode, Small Signal, 0.2A, 85V, SMD SOT-23 [LIC006]"
D3 D4: "Diode, General Purpose Rectifier, 3A, 200V, SMD DO-214AB [LIC189]"
IC1 IC2: "IC, I2C to 1 Wire Bridge, SMD SOIC8"
IC3: "IC, 6 Channel Digital Isolator, SMD [LIC572]"
IC4 IC8 IC9 IC10 IC11 IC12 IC16: "LED, SMD, 0805 Green [LIC016]"
IC5: "IC, Hall Effect Current Sensor, PTH"
IC6: "IC, Relay Driver, 28V Industrial, SMD SOT23 [LIC292]"
IC7: "IC, Digital Temp Sensor, SMD QFN16 [LIC556]"
IC13: "IC, Voltage Regulator, 0.35A, 12V, SMD D2PAK [LIC294]"
IC14: "IC, High Speed CAN Transceiver, SMD SOIC8 [LIC522]"
IC15: "Raspberry Pi Model B"
IC17: "IC, Voltage Regulator, 400mA, 3.3V LDO, SMD DPAK [LIC233]"
IC18: "IC, Pressure Sensor IC, SMD QFN8 [LIC524]"
IC19 IC22: "IC, High Volt LDO, 0.7A [LIC601]"
IC20 IC21: "IC, Isolation Amplifier, SMD SOIC8 [LIC549]"
MH1 MH2 MH3 MH4 MH5: "3MM Mouting Hole, Square"
PW1: "Non Isolated DC/DC Module"
Q1 Q2: "FET, P Channel, Logic Level, SMD SOT23 [LIC215]"
R1 R2 R3 R4 R14 R15 R16: "Resistor, Ceramic Chip, 10K, 0.1W, 1%, SMD 0603 [LRE030]"
R5 R18 R19: "Resistor, Ceramic Chip, 4K7, 0.1W, 1%, SMD 0603 [LRE058]"
R6: "Resistor, Ceramic Chip, 47R, 0.1W, 1%, SMD 0603 [LRE037]"
R8 R9 R10: "Resistor, Ceramic Chip, 0R, 0.1W, SMD 0603 [LRE026]"
R11 R12 R20 R21 R22 R25: "Resistor, Ceramic Chip, 2.2K, 0.1W, 1%, SMD 0603 [LRE027]"
R13: "Resistor, Ceramic Chip, 121R, 0.33W, 1%, SMD 1210 [LRE077]"
R23 R29: "Resistor, Thick Film, 300K, 0.500W, 200V, 1%, SMD 1206 [LRE194]"
R24 R30: "Resistor, Ceramic Chip, 82R, 0.063W, 1%, SMD 0805 [LRE123]"
R26 R31: "Resistor, Ceramic Chip, 1K0, 0.063W, 1%, SMD 0603 [LRE106]"
R27 R32: "Resistor, Ceramic Chip, 220R, 0.25W, 1%, SMD 0805 [LRE013]"
R28 R33: "Resistor, Thick Film, 1K, 0.75W, 5%, 400V, SMD 2010 [LRE133]"
RLY1: "Relay, DPDT, 24V, Socket Mount"
RLY2: "Relay, DPDT, Non Latching, 24VDC Coil, 1A Rating, PTH"
TP1 TP2 TP3 TP4 TP5 TP6 TP7 TP8 TP9 TP10 TP11 TP12: "SMD Test Point"

## Free pads (board coordinates)
  round 6 hole 3.5: 0(110.5,23.6) 0(110.5,73.6) 0(155.5,23.6) 0(155.5,73.6) 0(170.5,23.6) 0(170.5,73.6)

## Via types
v1: diameter 1.2, hole 0.6, Top Layer to Bottom Layer, 168 vias
v2: diameter 1.016, hole 0.5, Top Layer to Bottom Layer, tented both sides, 40 vias
v3: diameter 0.5, hole 0.2, Top Layer to Bottom Layer, 4 vias

## Nets (pads, with @x,y where several pads share a name; then routed paths per layer and width w, separated by ;. In a path a pad name is that pad's centre, name@x,y a point inside that pad or via, vN(x,y) a via of type N, cw(c..) or ccw(c..) an arc to the next point about the centre after c; other vN are vias at no path point)
AD1IN_11_X_AD2IN_11: CN8.63
AD1IN_12_X_AD2IN_12: CN8.65
AD1IN_13_X_AD2IN_13: CN8.67
AD1IN_14_X_AD2IN_14: CN8.69
AD1IN_15_X_AD2IN_15: CN8.71
AD1IN_16_X_AD2IN_00: CN8.7
AD1IN_17_X_AD2IN_01: CN8.9
AD1IN_18_X_AD2IN_02: CN8.11
AD1IN_19_X_AD2IN_03: CN8.13
AD1IN_20_X_AD2IN_04: CN8.15
AD1IN_21_X_AD2IN_05: CN8.17
AD1IN_22_X_AD2IN_06: CN8.19
AD1IN_23_X_AD2IN_07: CN8.21
ADREFHI: CN8.66
ADREFLO: CN8.16
BATT_N_HOT: C23.2 CN4.1 IC20.3 IC20.4 R27.1 R28.1 RLY1.5 | length 105
  Top Layer w0.5: IC20.3@97.1,77.118 100.718,77.118 101,77.4 101,79.4 100.742,79.658 IC20.4@97.1,79.658 ; v1(107,112.8) R28.1@107,115.048 ; v1(109.9,117.2) 120.6,117.2 v1(122.1,115.7) ; v1(113.2,97.9) 113.202,97.898 C23.2@121.2,97.898
  Bottom Layer w0.5: v1(100.9,79.4) 100.9,96.9 101.9,97.9 v1(113.2,97.9) 113.2,112.1 112.5,112.8 v1(107,112.8) 107,116.4 107.8,117.2 v1(109.9,117.2) ; v1(122.1,115.7) 133.198,115.7 RLY1.5@135.405,113.493
BATT_P_HOT: CN3.1 IC5.A IC19.3 R23.2 | length 95.1
  Top Layer w0.5: R23.2@107,126.148 102.948,126.148 102.9,126.1 ; IC19.3@115.3,106.133 113.167,106.133 112.5,106.8 112.5,109 111.7,109.8 103.5,109.8 102.9,110.4 102.9,126.1 ; IC5.A@145.72,145.138 130.338,145.138 129.1,143.9 129.1,132.9 128.5,132.3 104.5,132.3 102.9,130.7 102.9,126.1
BMS_3V3: C7.1 CN2.14 IC3.16 R3.2 R4.2 | length 51.4
  Top Layer w0.3: R4.2@87.2,43.45 87.2,40.7 87.4,40.5 v1(87.85,40.5) 88.3,40.5 88.4,40.6 R3.2@88.4,43.45 ; C7.1@88.1,52.45 v1(91.15,52.45) 91.4,52.2 91.4,51 91.275,50.875 IC3.16@89.275,50.875
  Top Layer w1: v1(108.9,56.3) 112.815,56.3 CN2.14@112.895,56.22
  Bottom Layer w1: v1(87.85,40.5) 87.85,50.95 89.35,52.45 v1(91.15,52.45) 99.95,52.45 100.8,53.3 104.7,53.3 107.7,56.3 v1(108.9,56.3)
BMS_GND: C7.2 CN2.2 IC3.9 | length 53.9
  Top Layer w0.3: C7.2@88.1,53.95 v1(88.1,55.4) ; IC3.9@89.275,46.325 90.975,46.325 91.3,46 v1(91.3,45)
  Top Layer w1: v1(88.1,55.4) 102.4,55.4 102.6,55.2 102.6,43 104.6,41 v1(108.9,41) 108.92,40.98 CN2.2@112.895,40.98
  Bottom Layer w1: v1(91.3,45) v1(102.7,45)
BMS_IRQ: CN8.42 IC3.7 R2.1 TP6.1 | length 80.4
  Top Layer w0.3: CN8.42@72.405,21.568 72.405,13.105 72.98,12.53 92.08,12.53 93.12,13.57 93.12,37.05 92.57,37.6 81.86,37.6 81.42,38.04 81.42,46.6 81.795,46.975 IC3.7@83.725,46.975 85.025,46.975 85.3,46.7 85.3,46.2 84.8,45.7 84.5,45.7 84.4,45.6 R2.1@84.4,44.95
BMS_IRQ_OUT: CN2.9 IC3.10 R3.1 | length 79.6
  Top Layer w0.3: R3.1@88.4,44.95 88.4,45.4 87.7,46.1 87.7,46.6 88.075,46.975 IC3.10@89.275,46.975 93.125,46.975 94,46.1 94,32.6 94.9,31.7 104.9,31.7 106.4,33.2 124.8,33.2 125.9,34.3 125.9,50.1 124.86,51.14 CN2.9@118.105,51.14
BMS_MISO: CN8.88 IC3.4 TP3.1 | length 86.2
  Top Layer w0.3: v1(77.77,15.33) 78.29,15.33 79.41,14.21 91.06,14.21 91.85,15 91.85,32.85 89.06,35.64 80.05,35.64 79.65,36.04 79.65,48.54 80.035,48.925 IC3.4@83.725,48.925
  Bottom Layer w0.3: CN8.88@67.325,25.388 66.338,25.388 64.93,23.98 64.93,22.99 65.98,21.94 65.98,16.45 66.37,16.06 76.53,16.06 77.26,15.33 v1(77.77,15.33)
BMS_MISO_OUT: CN2.1 IC3.13 | length 49.8
  Top Layer w0.3: IC3.13@89.275,48.925 98.375,48.925 99.2,48.1 99.2,38 99.8,37.4 121.3,37.4 121.7,37.8 121.7,40.5 121.22,40.98 CN2.1@118.105,40.98
BMS_MOSI: CN8.38 IC3.2 TP1.1 | length 77.7
  Top Layer w0.3: CN8.38@67.325,21.568 67.325,19.405 67.94,18.79 v1(70.82,18.79) ; v1(81.49,18.5) 81.87,18.12 81.87,16.26 82.49,15.64 89.81,15.64 90.79,16.62 90.79,32.11 88.35,34.55 79.1,34.55 78.56,35.09 78.56,49.9 78.885,50.225 IC3.2@83.725,50.225
  Bottom Layer w0.3: v1(70.82,18.79) 71.11,18.5 v1(81.49,18.5)
BMS_MOSI_OUT: CN2.3 IC3.15 | length 61.4
  Top Layer w0.3: IC3.15@89.275,50.225 100.375,50.225 100.8,49.8 100.8,41.1 ; 100.8,43.3 100.8,41.1 ; v1(102,35.6) 101.8,35.6 102.6,36.4 122.6,36.4 122.7,36.5 122.7,43.1 122.28,43.52 CN2.3@118.105,43.52 ; v1(102,39.9) 100.8,41.1
  Bottom Layer w0.3: v1(102,35.6) v1(102,39.9)
BMS_NCS: CN8.81 IC3.6 R1.1 TP5.1 | length 139.9
  Top Layer w0.3: CN8.81@58.435,27.288 58.435,28.755 57.47,29.72 46.21,29.72 45.02,28.53 45.02,17.48 46,16.5 65.5,16.5 67.1,14.9 67.1,12.33 67.7,11.73 ; 67.9,11.73 67.7,11.73 ; R1.1@85.6,44.95 85.6,45.4 85.9,45.7 85.9,47.3 85.575,47.625 IC3.6@83.725,47.625 81.405,47.625 80.82,47.04 80.82,37.76 81.55,37.03 90.91,37.03 v1(91.73,36.21) ; 96.03,29.6 96.03,29.53 ; v1(96.03,30.39) 96.03,29.53 ; 67.7,11.73 95.05,11.73 96.03,12.71 96.03,15.8 94.4,17.43 94.4,27.9 96.03,29.53
  Bottom Layer w0.3: v1(91.73,36.21) 95.28,36.21 96.03,35.46 v1(96.03,30.39)
BMS_NCS_OUT: CN2.7 IC3.11 R4.1 | length 74.9
  Top Layer w0.3: R4.1@87.2,44.95 87.2,47.2 87.625,47.625 IC3.11@89.275,47.625 93.875,47.625 94.9,46.6 94.9,33.6 95.8,32.7 104.6,32.7 106,34.1 124,34.1 125,35.1 125,47.8 124.2,48.6 CN2.7@118.105,48.6
BMS_PWR_AVAIL: CN8.33 IC3.5 TP4.1 | length 87.5
  Top Layer w0.3: v1(75.71,14.42) 76.72,13.41 91.44,13.41 92.36,14.33 92.36,33.28 89.18,36.46 80.94,36.46 80.3,37.1 80.3,47.79 80.785,48.275 IC3.5@83.725,48.275
  Bottom Layer w0.3: CN8.33@60.975,23.468 60.975,15.515 62.07,14.42 v1(75.71,14.42)
BMS_PWR_AVAIL_OUT: CN2.10 IC3.12 | length 27
  Top Layer w0.3: IC3.12@89.275,48.275 96.625,48.275 v1(97.4,47.5) ; v1(109.2,51.14) CN2.10@112.895,51.14
  Bottom Layer w0.3: v1(97.4,47.5) 102.3,47.5 102.9,48.1 102.9,50.7 103.3,51.1 109.16,51.1 v1(109.2,51.14)
BMS_SCK: CN8.39 IC3.3 TP2.1 | length 78.8
  Top Layer w0.3: v1(80.12,16.29) 80.12,15.31 80.51,14.92 90.43,14.92 91.26,15.75 91.26,32.47 88.67,35.06 79.7,35.06 79.11,35.65 79.11,49.11 79.575,49.575 IC3.3@83.725,49.575
  Bottom Layer w0.3: CN8.39@68.595,23.468 68.595,18.015 69.36,17.25 79.16,17.25 v1(80.12,16.29)
BMS_SCK_OUT: CN2.5 IC3.14 | length 66.3
  Top Layer w0.3: IC3.14@89.275,49.575 99.625,49.575 100.1,49.1 100.1,38.9 100.8,38.2 103.2,38.2 104,39 v1(104.7,39) ; v1(104.2,34.9) 104.4,34.9 104.7,35.2 123.2,35.2 123.8,35.8 123.8,45.4 123.14,46.06 CN2.5@118.105,46.06
  Bottom Layer w0.3: v1(104.2,34.9) 104.2,38.5 v1(104.7,39)
CAN_H: CN13.1 CN14.1 IC14.7 R13.1 | length 78.7
  Top Layer w0.3: IC14.7@21.86,79.093 20.317,79.093 19.54,79.87 19.54,97.61 19.022,98.128 CN13.1@12.36,98.128 12.36,96.46 6.18,90.28 6.18,79.3 9.72,75.76 9.72,72.93 11.317,71.333 CN14.1@12.36,71.333 15.747,71.333 16.58,70.5 16.58,64.71 17.08,64.21 21.41,64.21 22,63.62 R13.1@22,61.42